# EAGLE board schema (EAGLE 9.6.2)
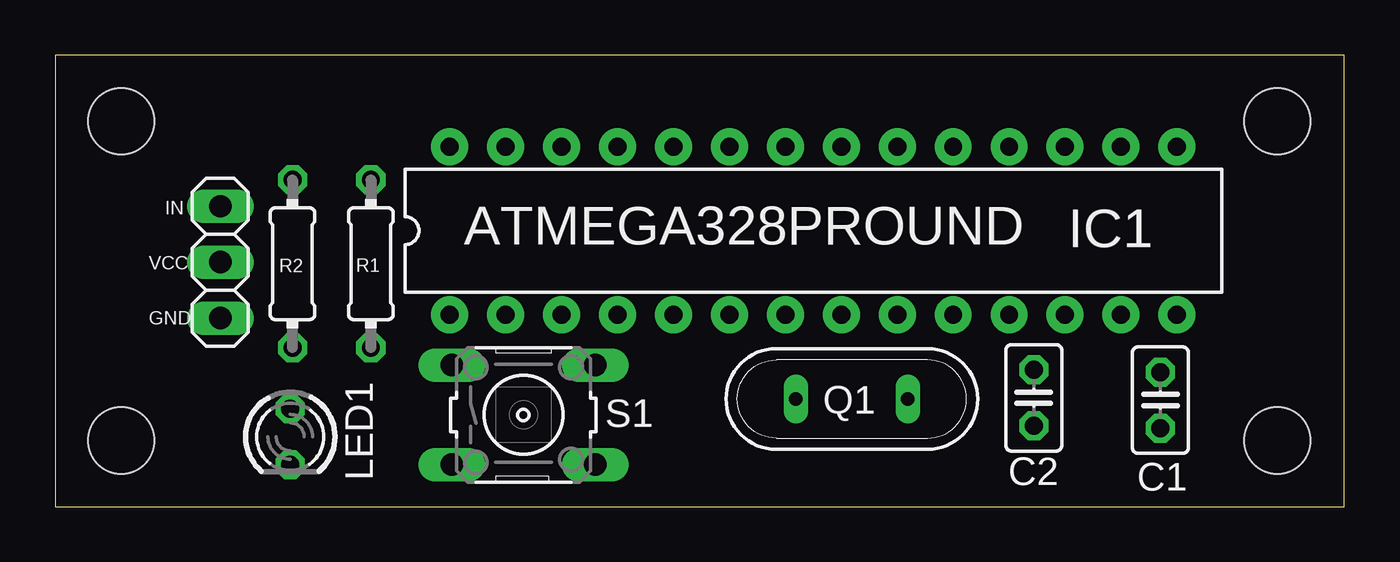
[diagram p0: board, top side]
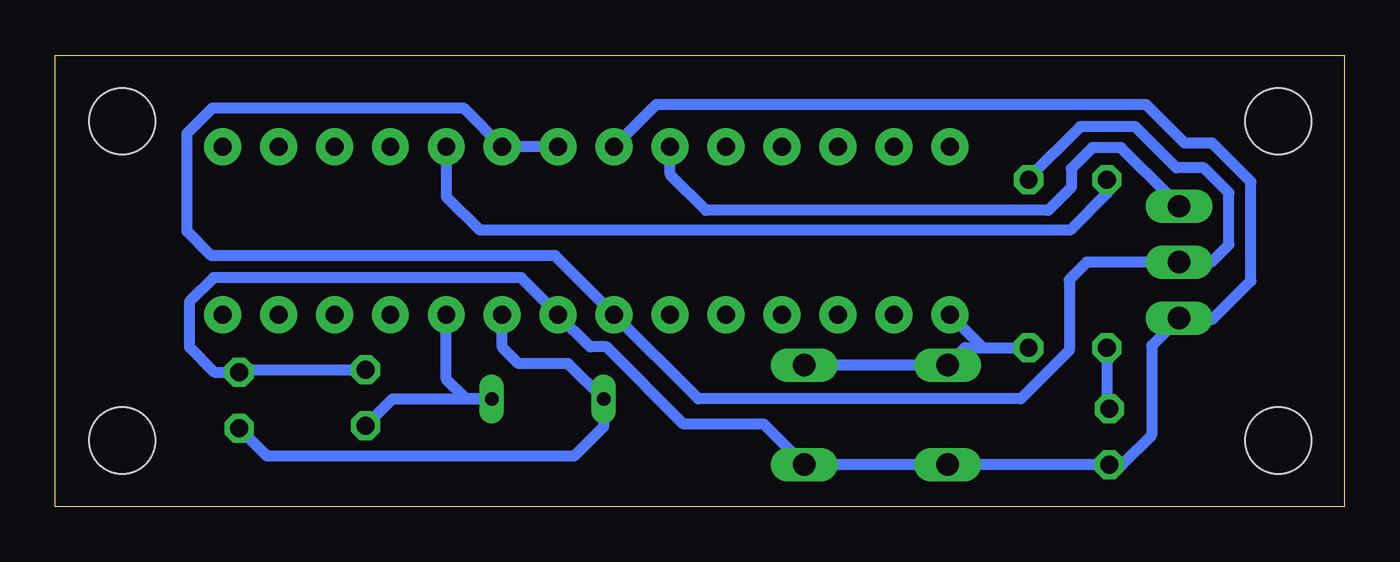
[diagram p1: board, bottom side, seen from below]

Size 58.55 x 20.5 mm. Coordinates in mm from the lower left corner, seen from the top.
Outline: 0,0 58.55,0 58.55,20.5 0,20.5 0,0
Copper layers (1*16): Top 0.035mm / dielectric 1.5mm / Bottom 0.035mm
Design rules "default": minimum track width 6mil, minimum drill 0.35mm, track to track 6mil, track to pad 6mil, pad to pad 6mil, via to via 6mil, smd to smd 6mil, copper to edge 40mil, drill to drill 6mil, minimum pad ring 10mil, minimum via ring 8mil, stop-mask expansion 4mil, vias tented up to drill 0mil, thermal gap 10mil
Holes 3 mm at 3,17.5 3,3 55.5,3 55.5,17.5

## Footprints (pad centres in the part's own frame; a part is rotated, then mirrored left to right if it is on the bottom)
C025-025X050 = drill 0.813 octagon: 1 -1.27,0; 2 1.27,0
DIL28-3-ROUND = drill 0.813 pad 1.676: 1 -16.51,-3.81; 2 -13.97,-3.81; 3 -11.43,-3.81; 4 -8.89,-3.81; 5 -6.35,-3.81; 6 -3.81,-3.81; 7 -1.27,-3.81; 8 1.27,-3.81; 9 3.81,-3.81; 10 6.35,-3.81; 11 8.89,-3.81; 12 11.43,-3.81; 13 13.97,-3.81; 14 16.51,-3.81; 15 16.51,3.81; 16 13.97,3.81; 17 11.43,3.81; 18 8.89,3.81; 19 6.35,3.81; 20 3.81,3.81; 21 1.27,3.81; 22 -1.27,3.81; 23 -3.81,3.81; 24 -6.35,3.81; 25 -8.89,3.81; 26 -11.43,3.81; 27 -13.97,3.81; 28 -16.51,3.81
1X03 = drill 1.016 long: 1 -2.54,0; 2 0,0; 3 2.54,0
LED3MM = drill 0.813 octagon: A -1.27,0; K 1.27,0
QS = drill 0.61 long: 1 -2.54,0; 2 2.54,0
0204/7 = drill 0.813 octagon: 1 -3.81,0; 2 3.81,0
B3F-10XX = drill 1.016 long: 1 -3.251,2.261; 2 3.251,2.261; 3 -3.251,-2.261; 4 3.251,-2.261

## Placement (x,y rotation side)
C1  22pF  [C025-025X050]  50.19,4.84 270 top
C2  22pF  [C025-025X050]  44.44,4.94 270 top
IC1  ATMEGA328PROUND  [DIL28-3-ROUND]  34.43,12.53 0 top
JP2  PINHD-1X3  [1X03]  7.5,11.1 270 top
LED1  [LED3MM]  10.68,3.17 270 top
Q1  16MHZ  [QS]  36.18,4.89 180 top
R1  10K  [0204/7]  14.34,11.03 90 top
R2  470  [0204/7]  10.78,11.03 90 top
S1  [B3F-10XX]  21.27,4.17 0 top

## Library data of the parts
C1 C2 = rcl; SPICEPREFIX: C
IC1 = atmega328; SPICEPREFIX: X
JP2 = Connector; CATEGORY: CONNECTOR; SPICEPREFIX: J; SUB-CATEGORY: PIN-HEADER
LED1 = led
Q1 = special
R1 R2 = rcl; SPICEPREFIX: R
S1 = switch-omron; MPN: B3F-1000; OC_FARNELL: 176432; OC_NEWARK: 36M3542

## Nets
GND: C1.1 C2.1 IC1.8 IC1.22 JP2.3 LED1.K S1.3 S1.4
N$1: IC1.19 R2.2
N$2: IC1.1 R1.1 S1.1 S1.2
N$3: C2.2 IC1.10 Q1.1
N$5: LED1.A R2.1
N$6: C1.2 IC1.9 Q1.2
N$7: IC1.23 JP2.1
VCC: IC1.7 IC1.20 IC1.21 JP2.2 R1.2

## Tracks (layer width: path | path; a pad name or v marks a point on that pad's centre or on a via)
GND
  Bottom 0.508: C2.1 50.09,6.21 C1.1 51.31,6.11 52.45,7.25 52.45,9.3 51.35,10.4 37.38,10.4 IC1.8 35.7,8.7 34.25,7.25 33.5,7.25 30,3.75 26.36,3.75 S1.4 S1.3 LED1.K 10.1,1.9 8.75,3.25 8.75,7.31 JP2.3 7.44,8.5 6,8.5 4.25,10.25 4.25,14.75 6,16.5 7.25,16.5 9,18.25 31.25,18.25 IC1.22
N$1
  Bottom 0.508: 10.95,14.84 R2.2 10.78,14.22 12.45,12.55 39.25,12.55 40.78,14.08 IC1.19
N$2
  Bottom 0.508: S1.2 S1.1 17.23,7.22 16.42,7.22 | 16.42,7.22 R1.1 | IC1.1 16.42,7.22
N$3
  Bottom 0.508: C2.2 43.22,4.89 Q1.1 39.89,4.89 40.78,5.78 IC1.10
N$5
  Bottom 0.508: R2.1 10.78,4.54 LED1.A
N$6
  Bottom 0.508: IC1.9 38.24,7.24 37.5,6.5 35.25,6.5 Q1.2 33.64,3.64 34.98,2.3 48.92,2.3 C1.2
N$7
  Bottom 0.508: JP2.1 8,14.14 8,14.15 10.15,16.3 11.45,16.3 12.4,15.35 12.4,14.5 13.45,13.45 29,13.45 30.62,15.07 IC1.23
VCC
  Bottom 0.508: IC1.21 IC1.20 40,18.1 51.4,18.1 52.55,16.95 52.55,12.5 51.45,11.4 35.84,11.4 IC1.7 29.34,4.9 14.7,4.9 12.5,7.1 12.5,10.3 11.7,11.1 JP2.2 6.05,11.1 5.25,11.9 5.25,14.25 6.38,15.38 7.62,15.38 9.5,17.25 12,17.25 14.34,14.91 R1.2

## Text on the board
tPlace: IN | VCC | GND